# Altium PCB PCB.PcbDoc
Units mm, origin at the board's own origin, x right, y up, seen from the top; angles counter-clockwise.
Board outline 100 x 100 mm, 2 copper layers (Top Layer, Bottom Layer); 106 components, 61 nets, 339 pads, 12 vias.
Unrouted connection lines stored in the file: 3.
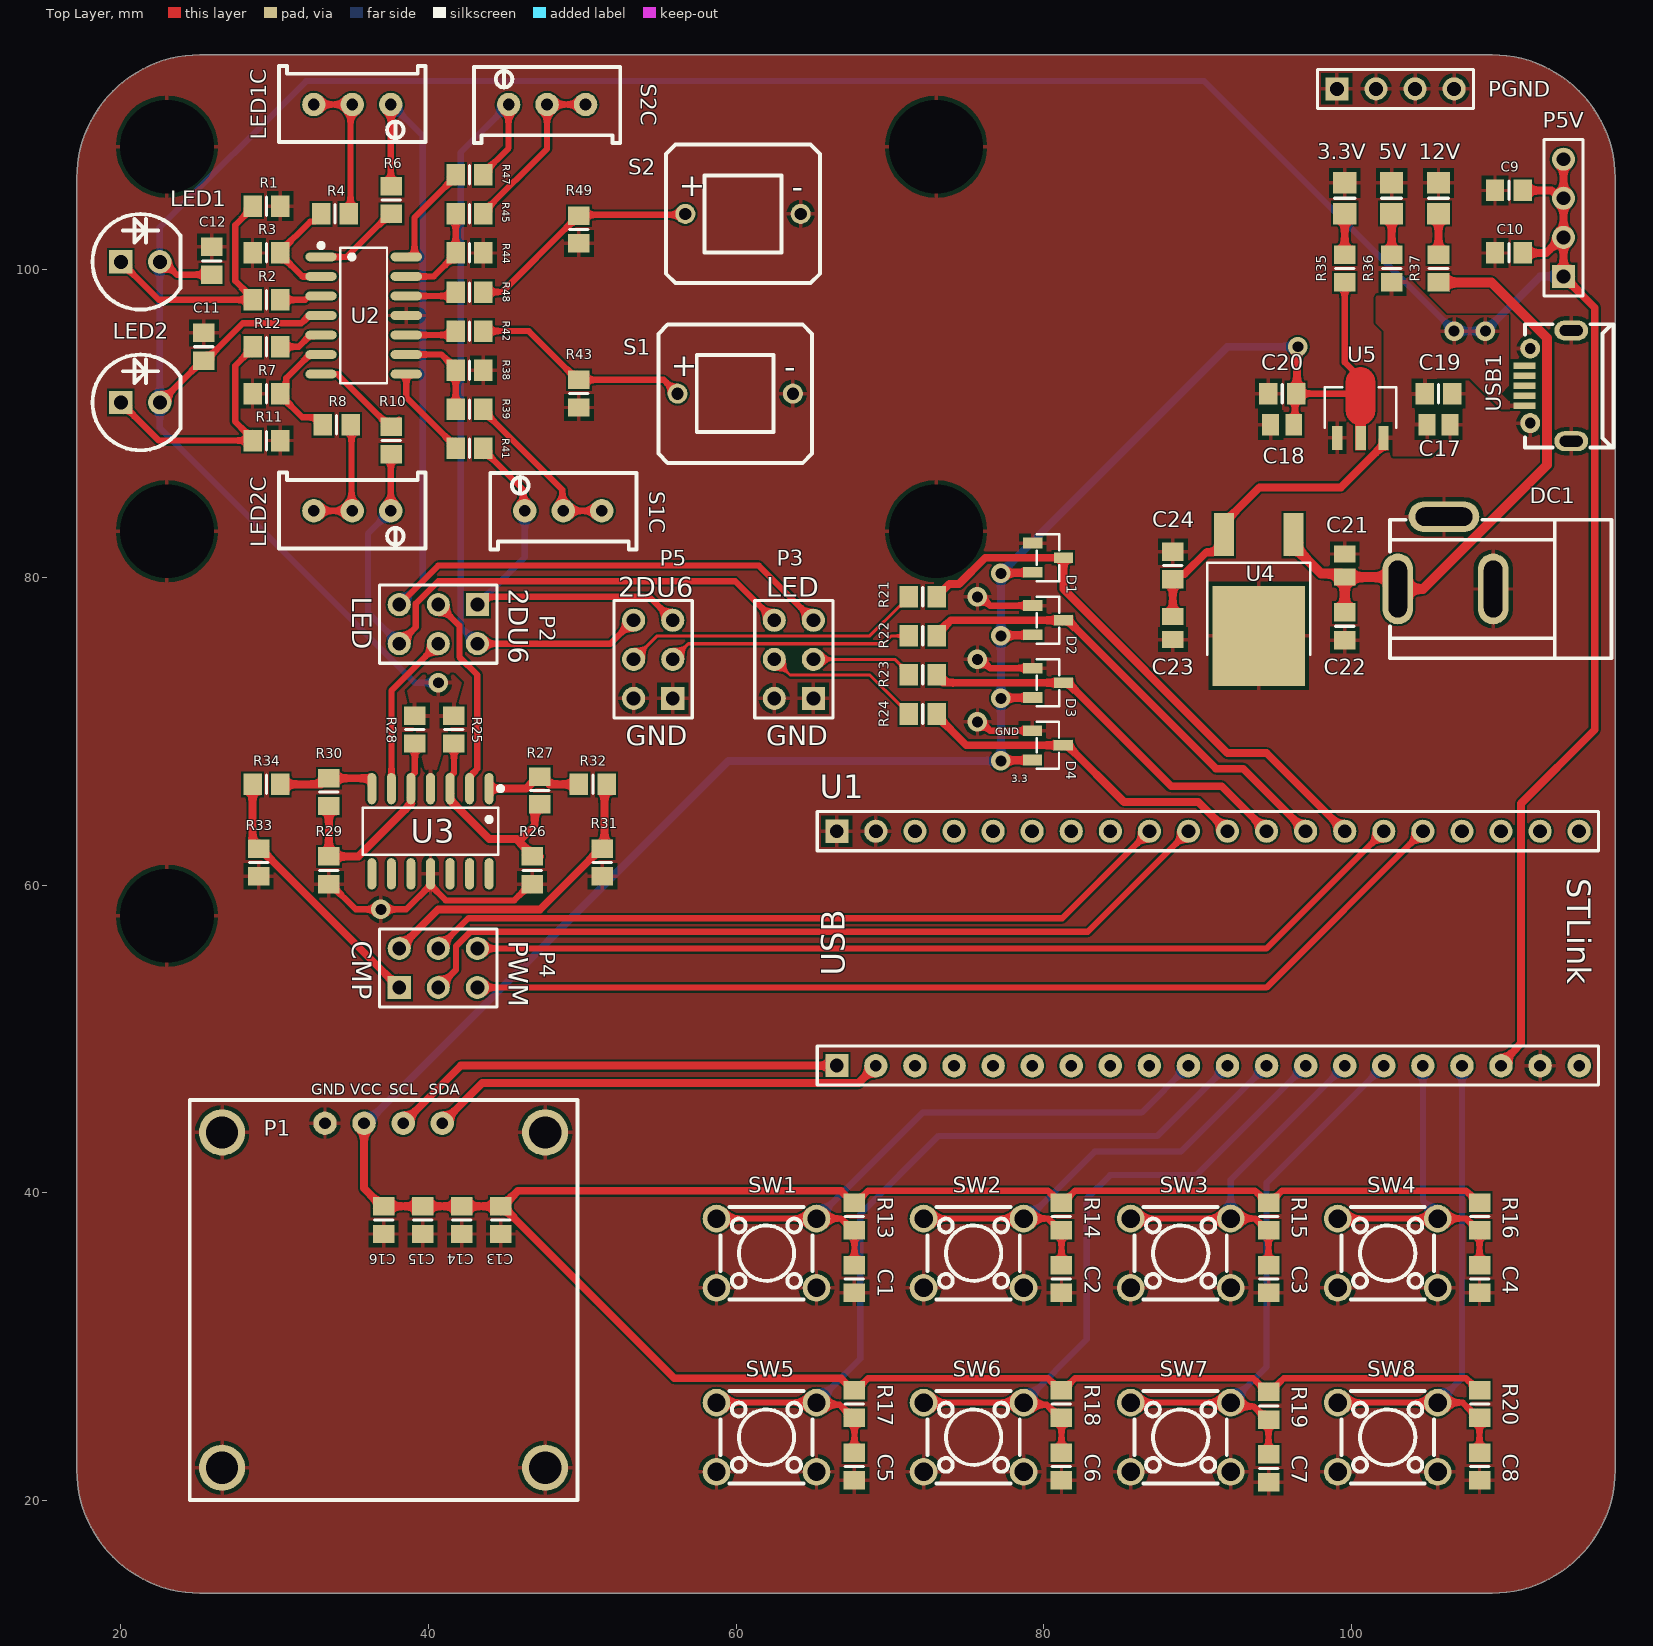
[diagram p0: Top Layer view]
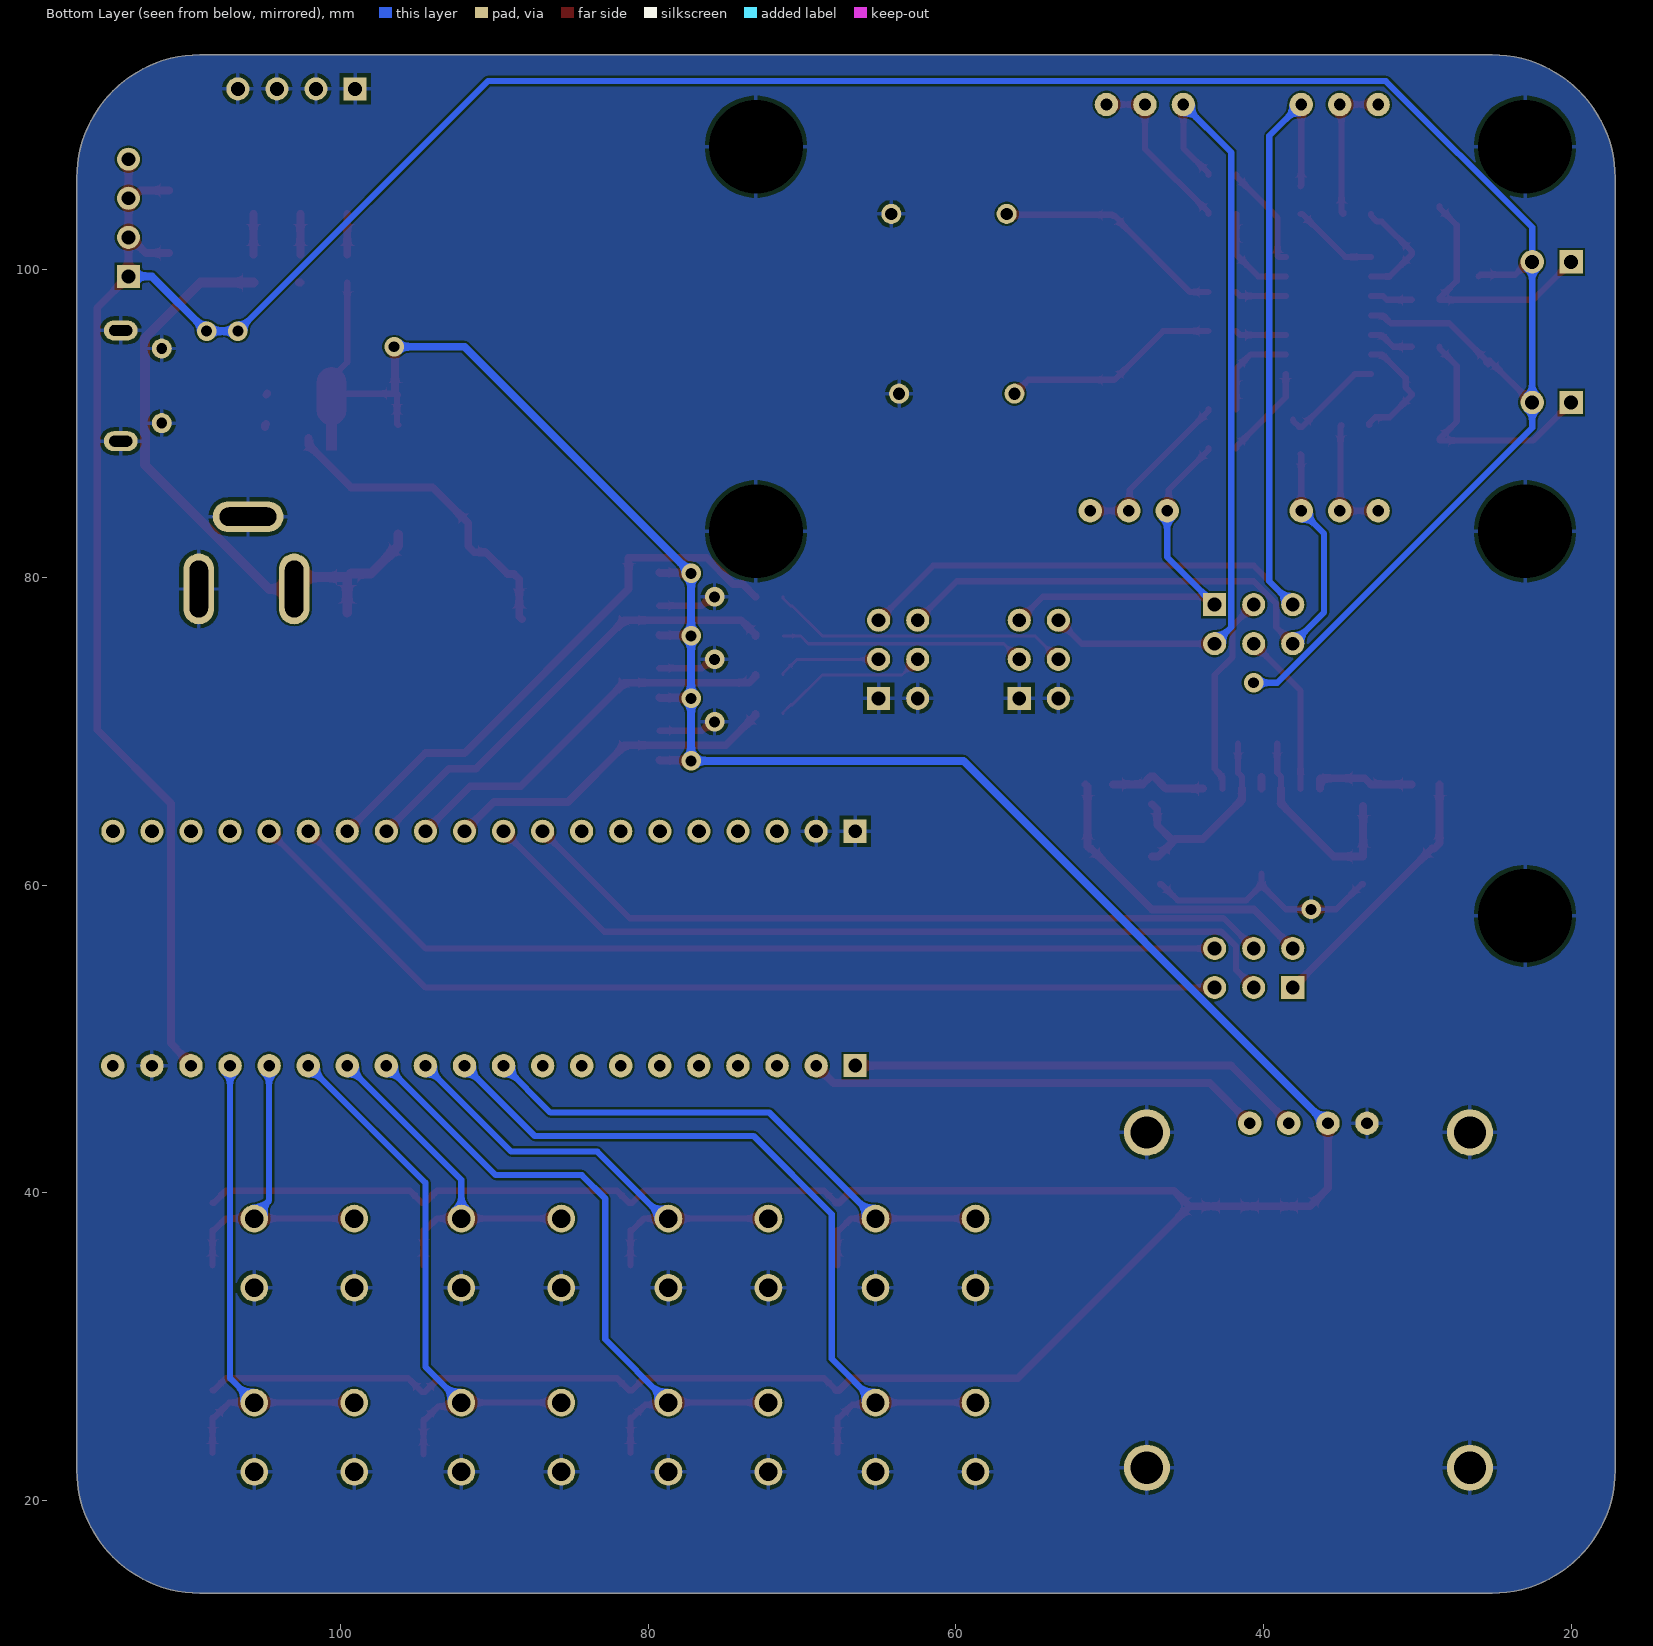
[diagram p1: Bottom Layer view, seen from below]

## Layer stack, top to bottom
Top Solder: solder mask 0.0102, Solder Resist, Dk 3.5
Top Layer: signal copper 0.0356
Dielectric 1: dielectric 0.32, FR-4, Dk 4.8
Bottom Layer: signal copper 0.0356
Bottom Solder: solder mask 0.0102, Solder Resist, Dk 3.5

## Board outline
17.145,21.97 ccw(c25.145,21.97) 25.145,13.97 109.145,13.97 ccw(c109.145,21.97) 117.145,21.97 117.145,105.97 ccw(c109.145,105.97) 109.145,113.97 25.145,113.97 ccw(c25.145,105.97) 17.145,105.97

## Design rules (kind name [scope] priority, off if disabled: settings)
Clearance [All] p1: gap=0.127 ignorepadtopadclearanceinfootprint=FALSE
DiffPairsRouting [All] p1: maxlimit=0.254 minlimit=0.127 mostfreqgap=0.254 toplayer_minwidth=0.381 toplayer_maxwidth=0.381 toplayer_prefwidth=0.381 bottomlayer_minwidth=0.381 bottomlayer_maxwidth=0.381 bottomlayer_prefwidth=0.381 maxuncoupledlength=12.7
HoleToHoleClearance [All] p1: gap=0.127 allowstackedmicrovias=TRUE
MinimumSolderMaskSliver [All] p1: minsoldermaskwidth=0.127
PlaneConnect [All] p1: planeconnectstyle=Relief reliefexpansion=0.508 reliefentries=4 reliefconductorwidth=0.254 reliefairgap=0.127
PolygonConnect 直接连接 [All vs IsNamedPolygon('NONET_L01_P000')] p1: thpad.connectstyle=Direct thpad.reliefconductorwidth=0.254 thpad.reliefentries=4 thpad.polygonreliefangle="90 Angle" thpad.airgapwidth=0.254 smdpad.connectstyle=Direct smdpad.reliefconductorwidth=0.254 smdpad.reliefentries=4 smdpad.polygonreliefangle="90 Angle" smdpad.airgapwidth=0.254 via.connectstyle=Relief via.reliefconductorwidth=0.254 via.reliefentries=4 via.polygonreliefangle="90 Angle" via.airgapwidth=0.254
PolygonConnect [All] p2: connectstyle=Relief reliefconductorwidth=0.254 reliefentries=4 polygonreliefangle="90 Angle" airgapwidth=0.254
RoutingVias [All] p1: holewidth=0.711 width=1.27 viastyle="Through Hole" minholewidth=0.2 minwidth=0.3 maxholewidth=6.3 maxwidth=9
SilkToSilkClearance [All] p1: silktosilkclearance=0.127
SilkToSolderMaskClearance [IsPad] p1: minsilkscreentomaskgap=0.127 clearancetoexposedcopper=TRUE
SolderMaskExpansion [All] p1: expansion=0.102 istentingtop=FALSE
Width [All] p1: maxlimit=1.016 minlimit=0.127 preferedwidth=0.406
24 further rules are at their usual default settings.

## Classes and differential pairs
net class Power: VCC_3.3V VCC_5V VCC_12V

## Components (designator, comment, footprint, x,y, rotation, side; value= is the part's Value field where it differs from the comment)
3.3V "" 6-0805_M 99.568,104.648 r90 top
5V "" 6-0805_M 102.616,104.648 r90 top
12V "" 6-0805_M 105.664,104.648 r90 top
C1 "Cap Semi" 6-0805_N 67.691,34.391 r270 top value=100pF
C2 "Cap Semi" 6-0805_N 81.153,34.391 r270 top value=100pF
C3 "Cap Semi" 6-0805_N 94.615,34.391 r270 top value=100pF
C4 "Cap Semi" 6-0805_N 108.331,34.391 r270 top value=100pF
C5 "Cap Semi" 6-0805_N 67.691,22.199 r270 top value=100pF
C6 "Cap Semi" 6-0805_N 81.153,22.199 r270 top value=100pF
C7 "Cap Semi" 6-0805_N 94.615,22.083 r270 top value=100pF
C8 "Cap Semi" 6-0805_N 108.331,22.199 r270 top value=100pF
C9 "Cap Semi" 6-0805_N 110.236,105.156 r0 top value=10uF
C10 "Cap Semi" 6-0805_N 110.236,101.092 r0 top value=0.1uF
C11 "Cap Semi" 6-0805_N 25.4,94.996 r270 top value=0.1uF
C12 "Cap Semi" 6-0805_N 25.908,100.584 r270 top value=0.1uF
C13 "Cap Semi" 6-0805_N 44.704,38.216 r90 top value=10uF
C14 "Cap Semi" 6-0805_N 42.164,38.216 r90 top value=0.1uF
C15 "Cap Semi" 6-0805_N 39.624,38.216 r90 top value=0.1uF
C16 "Cap Semi" 6-0805_N 37.084,38.216 r90 top value=0.1uF
C17 "Cap Pol3" C0805 105.664,89.916 r0 top value=10uF
C18 "Cap Pol3" C0805 95.504,89.916 r180 top value=10uF
C19 "Cap Semi" 6-0805_N 105.664,91.948 r180 top value=10pF
C20 "Cap Semi" 6-0805_N 95.504,91.948 r0 top value=10pF
C21 "Cap Pol3" C0805 99.568,80.772 r90 top value=10uF
C22 "Cap Semi" 6-0805_N 99.568,76.824 r270 top value=10pF
C23 "Cap Pol3" C0805 88.392,76.708 r270 top value=10uF
C24 "Cap Semi" 6-0805_N 88.392,80.772 r270 top value=10pF
D1 "BAT54S_C501650" SOT-23-3_L2.9-W1.3-P1.90-LS2.4-BR 80.28,81.28 r180 top
D2 "BAT54S_C501650" SOT-23-3_L2.9-W1.3-P1.90-LS2.4-BR 80.28,77.216 r180 top
D3 "BAT54S_C501650" SOT-23-3_L2.9-W1.3-P1.90-LS2.4-BR 80.28,73.152 r180 top
D4 "BAT54S_C501650" SOT-23-3_L2.9-W1.3-P1.90-LS2.4-BR 80.264,69.088 r180 top
DC1 "DC005_C431533" DC-IN-TH_DC005 106.12,81.598 r180 top
LED1 "SFH203PFA" LED-TH_BD5.9-P2.54-FD 21.336,100.584 r0 top
LED1C "RPot" RES-ADJ-TH_3P-L10.0-W10.0-P2.50-L 35.052,110.744 r180 top value=50K
LED2 "SFH203PFA" LED-TH_BD5.9-P2.54-FD 21.336,91.44 r0 top
LED2C "RPot" RES-ADJ-TH_3P-L10.0-W10.0-P2.50-L 35.052,84.328 r180 top value=50K
P1 "12864OLED" 12864_0.96_OLED 37.084,33.02 r0 top
P2 "Header 3X2" HDR2X3 43.18,78.232 r180 top
P3 "Header 3X2" HDR2X3 65.024,72.136 r90 top
P4 "Header 3X2" HDR2X3 38.1,53.34 r0 top
P5 "Header 3X2" HDR2X3 55.88,72.136 r90 top
P5V "VCC_5V" HDR1X4 113.792,99.568 r90 top
PGND "GND" HDR1X4 99.06,111.76 r0 top
R1 "Res2" 6-0805_N 29.464,104.14 r180 top value=10K
R2 "Res2" 6-0805_N 29.464,98.044 r0 top value=1K
R3 "Res2" 6-0805_N 29.464,101.092 r0 top value=1K
R4 "Res2" 6-0805_N 33.92,103.632 r0 top value=10K
R6 "Res2" 6-0805_N 37.592,104.532 r90 top value=1K
R7 "Res2" 6-0805_N 29.464,91.948 r0 top value=1K
R8 "Res2" 6-0805_N 34.036,89.916 r0 top value=10K
R10 "Res2" 6-0805_N 37.592,88.9 r270 top value=1K
R11 "Res2" 6-0805_N 29.464,88.9 r180 top value=10K
R12 "Res2" 6-0805_N 29.464,94.996 r0 top value=1K
R13 "Res2" 6-0805_N 67.691,38.455 r270 top value=10K
R14 "Res2" 6-0805_N 81.153,38.455 r270 top value=10K
R15 "Res2" 6-0805_N 94.615,38.455 r270 top value=10K
R16 "Res2" 6-0805_N 108.331,38.455 r270 top value=10K
R17 "Res2" 6-0805_N 67.691,26.263 r270 top value=10K
R18 "Res2" 6-0805_N 81.153,26.263 r270 top value=10K
R19 "Res2" 6-0805_N 94.615,26.147 r270 top value=10K
R20 "Res2" 6-0805_N 108.331,26.263 r270 top value=10K
R21 "Res2" 6-0805_N 72.136,78.74 r0 top value=10K
R22 "Res2" 6-0805_N 72.136,76.2 r0 top value=10K
R23 "Res2" 6-0805_N 72.136,73.66 r0 top value=10K
R24 "Res2" 6-0805_N 72.136,71.12 r0 top value=10K
R25 "Res2" 6-0805_N 41.656,70.104 r90 top value=1K
R26 "Res2" 6-0805_N 46.736,60.96 r270 top value=1K
R27 "Res2" 6-0805_N 47.244,66.156 r90 top value=1K
R28 "Res2" 6-0805_N 39.116,70.104 r90 top value=1K
R29 "Res2" 6-0805_N 33.528,60.96 r270 top value=1K
R30 "Res2" 6-0805_N 33.528,66.04 r270 top value=1K
R31 "Res2" 6-0805_N 51.308,61.468 r90 top value=1K
R32 "Res2" 6-0805_N 50.684,66.548 r180 top value=1K
R33 "Res2" 6-0805_N 28.956,61.468 r90 top value=1K
R34 "Res2" 6-0805_N 29.464,66.548 r0 top value=1K
R35 "Res2" 6-0805_N 99.568,100.076 r90 top value=10K
R36 "Res2" 6-0805_N 102.616,100.076 r90 top value=10K
R37 "Res2" 6-0805_N 105.664,100.076 r90 top value=10K
R38 "Res2" 6-0805_N 42.672,93.472 r180 top value=10K
R39 "Res2" 6-0805_N 42.672,90.932 r0 top value=10K
R41 "Res2" 6-0805_N 42.672,88.392 r0 top value=1K
R42 "Res2" 6-0805_N 42.672,96.012 r180 top value=10K
R43 "Res2" 6-0805_N 49.784,91.948 r90 top value=1K
R44 "Res2" 6-0805_N 42.672,101.092 r180 top value=10K
R45 "Res2" 6-0805_N 42.672,103.632 r0 top value=10K
R47 "Res2" 6-0805_N 42.672,106.172 r0 top value=1K
R48 "Res2" 6-0805_N 42.672,98.552 r180 top value=10K
R49 "Res2" 6-0805_N 49.784,102.616 r90 top value=1K
S1 "2DU6" 2DU6PERSONAL 59.944,91.948 r0 top
S1C "RPot" RES-ADJ-TH_3P-L10.0-W10.0-P2.50-L 48.768,84.328 r0 top value=50K
S2 "2DU6" 2DU6PERSONAL 60.452,103.632 r0 top
S2C "RPot" RES-ADJ-TH_3P-L10.0-W10.0-P2.50-L 47.712,110.744 r0 top value=50K
SW1 "TS665CJ" SW-TH_4P-L6.0-W6.0-P4.50-LS6.5 61.976,36.068 r0 top
SW2 "TS665CJ" SW-TH_4P-L6.0-W6.0-P4.50-LS6.5 75.438,36.068 r0 top
SW3 "TS665CJ" SW-TH_4P-L6.0-W6.0-P4.50-LS6.5 88.9,36.068 r0 top
SW4 "TS665CJ" SW-TH_4P-L6.0-W6.0-P4.50-LS6.5 102.362,36.068 r0 top
SW5 "TS665CJ" SW-TH_4P-L6.0-W6.0-P4.50-LS6.5 61.976,24.104 r0 top
SW6 "TS665CJ" SW-TH_4P-L6.0-W6.0-P4.50-LS6.5 75.438,24.104 r0 top
SW7 "TS665CJ" SW-TH_4P-L6.0-W6.0-P4.50-LS6.5 88.9,24.104 r0 top
SW8 "TS665CJ" SW-TH_4P-L6.0-W6.0-P4.50-LS6.5 102.362,24.104 r0 top
U1 "C6T6" STM32F103C6T6 66.548,48.26 r0 top
U2 "LM324N" SOIC-14_L8.7-W3.9-P1.27-LS6.0-BL 35.789,97.028 r270 top
U3 "LM324N" SOIC-14_L8.7-W3.9-P1.27-LS6.0-BL 40.132,63.5 r180 top
U4 "MC78M05CDTRKG" TO-252-2_L6.6-W6.1-P4.57-LS9.9-TL-CW 93.98,79.492 r270 top
U5 "AMS1117-3.3" SOT-89-3_L4.5-W2.5-P1.50-LS4.2-BR 100.584,90.424 r270 top
USB1 "MICROXNJ" MICRO-USB-SMD_MICROXNJ 112.776,92.456 r90 top

## Footprints (in the part's own frame and the unit in brackets; to place one, negate y for a bottom-side part, rotate by r counter-clockwise, add the part's x,y. Pads: shape width x height; smd on the part's side, far side on the other; paste and mask are expansions set on the pad)
2DU6PERSONAL [mm]
  round 1.3 hole 0.8: 1(-3.75,0) 2(3.75,0)
  silkscreen extent -5,-4.5 5,4.5
6-0805_M [mm] "Chip Resistor, Body 2.0x1.2mm, IPC Low Density"
  rect 1.4x1.5 smd: 1(-1,0) 2(1,0)
  silkscreen extent 0,-0.65 0,0.65, body extent -1.07,-0.7 1.07,0.7, height 0.7
6-0805_N [mm] "Chip Resistor, Body 2.0x1.2mm, IPC Medium Density"
  rect 1.2x1.4 smd: 1(-0.9,0) 2(0.9,0)
  silkscreen extent 0,-0.6 0,0.6, body extent -1.07,-0.7 1.07,0.7, height 0.7
12864_0.96_OLED [mm]
  round 1.524 hole 0.762: 0(-3.81,11.5) 1(-1.27,11.5) 2(1.27,11.5) 3(3.81,11.5)
  round 3 hole 2.1 unplated: 4(-10.5,10.9) 5(10.5,10.9) 6(-10.5,-10.9) 7(10.5,-10.9)
  silkscreen extent -12.6,-13 12.6,13
C0805 [mm] "Chip Capacitor, Body 2.0x1.3mm, IPC High Density"
  rect 1.1x1.4 smd: 1(-0.75,0) 2(0.75,0)
  body extent -1.1,-0.72 1.1,0.72, height 1.4
DC-IN-TH_DC005 [mm]
  oval 2x4.6 hole 1.2 slot 3.7 at 90 deg: 1(3.1,2.35) 2(-3.1,2.35)
  oval 4.6x2 hole 1.2 slot 3.7 at 0 deg: 3(0.1,-2.35)
  silkscreen extent -10.8,-2.15 3.6,6.85
HDR1X4 [mm] "Connector; Header; 4 Position"
  rect 1.5x1.5 hole 0.9: 1(0,0)
  round 1.5 hole 0.9: 2(2.54,0) 3(5.08,0) 4(7.62,0)
  silkscreen extent -1.27,-1.27 8.89,1.27
HDR2X3 [mm] "Connector; Header; 3x2 Position"
  rect 1.5x1.5 hole 0.9: 1(0,0)
  round 1.5 hole 0.9: 2(0,2.54) 3(2.54,0) 4(2.54,2.54) 5(5.08,0) 6(5.08,2.54)
  silkscreen extent -1.27,-1.27 6.35,3.81
LED-TH_BD5.9-P2.54-FD [mil]
  rect 60x60 hole 36: 1(-52.64,-2.66)
  round 60 hole 36: 2(47.36,-2.66)
  silkscreen extent -125,-125 100,120
MICRO-USB-SMD_MICROXNJ [mm]
  rect 0.4x1.4 smd: 1(-1.3,1.521) 2(-0.65,1.521) 3(0,1.521) 4(0.65,1.521) 5(1.3,1.521)
  round 1.3 hole 0.7: 6(2.425,1.149) 9(-2.425,1.149)
  oval 1.3x2.2 hole 0.7 slot 1.5 at 90 deg: 7(3.6,-1.521) 8(-3.6,-1.521)
  silkscreen extent -4,-4.26 4,1.49
RES-ADJ-TH_3P-L10.0-W10.0-P2.50-L [mil]
  round 60 hole 30: 1(-98.42,0) 2(98.42,0) 3(0,0)
  silkscreen extent -187,-98 187,96
SOIC-14_L8.7-W3.9-P1.27-LS6.0-BL [mm]
  oval 0.574x2.038 smd: 1(-3.81,-2.769) 2(-2.54,-2.769) 3(-1.27,-2.769) 4(0,-2.769) 5(1.27,-2.769) 6(2.54,-2.769) 7(3.81,-2.769) 8(3.81,2.769) 9(2.54,2.769) 10(1.27,2.769) 11(0,2.769) 12(-1.27,2.769) 13(-2.54,2.769) 14(-3.81,2.769)
  silkscreen extent -4.7,-2.92 4.4,1.52
SOT-23-3_L2.9-W1.3-P1.90-LS2.4-BR [mm]
  rect 1.25x0.7 smd: 1(1,-0.95) 2(1,0.95) 3(-1,0)
  silkscreen extent -0.73,-1.53 0.73,1.53
SOT-89-3_L4.5-W2.5-P1.50-LS4.2-BR [mm]
  rect 1.575x0.672 smd: 1(1.356,-1.5) 2(1.356,0.024) 3(1.356,1.5)
  Top Layer region: -2.283,0.959 -0.429,0.959 -0.384,0.958 -0.34,0.955 -0.296,0.949 -0.252,0.942 -0.208,0.933 -0.165,0.921 -0.123,0.908 -0.081,0.893 -0.04,0.875 0,0.856 0.04,0.835 0.078,0.812 0.115,0.788 0.151,0.761 0.185,0.733 0.219,0.704 0.251,0.673 0.281,0.64 0.31,0.606 0.337,0.571 0.362,0.534 0.386,0.497 0.408,0.458 0.428,0.418 0.447,0.339 2.144,0.339 2.144,-0.321 0.447,-0.321 0.428,-0.401 0.408,-0.44 0.386,-0.479 0.362,-0.517 0.337,-0.553 0.31,-0.588 0.281,-0.622 0.251,-0.655 0.219,-0.686 0.185,-0.716 0.151,-0.744 0.115,-0.77 0.078,-0.795 0.04,-0.818 0,-0.839 -0.04,-0.858 -0.081,-0.875 -0.123,-0.89 -0.165,-0.904 -0.208,-0.915 -0.252,-0.925 -0.296,-0.932 -0.34,-0.937 -0.384,-0.94 -0.429,-0.941 -2.283,-0.941 -2.328,-0.94 -2.372,-0.937 -2.416,-0.932 -2.46,-0.925 -2.504,-0.915 -2.547,-0.904 -2.589,-0.89 -2.631,-0.875 -2.672,-0.858 -2.713,-0.839 -2.752,-0.818 -2.79,-0.795 -2.827,-0.77 -2.863,-0.744 -2.898,-0.716 -2.931,-0.686 -2.963,-0.655 -2.993,-0.622 -3.022,-0.588 -3.049,-0.553 -3.075,-0.517 -3.098,-0.479 -3.12,-0.44 -3.141,-0.401 -3.159,-0.36 -3.175,-0.318 -3.189,-0.276 -3.202,-0.233 -3.212,-0.19 -3.22,-0.146 -3.227,-0.102 -3.231,-0.058 -3.233,-0.013 -3.233,0.031 -3.231,0.076 -3.227,0.12 -3.22,0.164 -3.212,0.208 -3.202,0.251 -3.189,0.294 -3.175,0.336 -3.159,0.377 -3.141,0.418 -3.12,0.458 -3.098,0.497 -3.075,0.534 -3.049,0.571 -3.022,0.606 -2.993,0.64 -2.963,0.673 -2.931,0.704 -2.898,0.733 -2.863,0.761 -2.827,0.788 -2.79,0.812 -2.752,0.835 -2.713,0.856 -2.672,0.875 -2.631,0.893 -2.589,0.908 -2.547,0.921 -2.504,0.933 -2.46,0.942 -2.416,0.949 -2.372,0.955 -2.328,0.958
  silkscreen extent -1.95,-2.33 0.7,2.33
STM32F103C6T6 [mm] "Connector; Header; 20X2 Position"
  rect 1.5x1.5 hole 0.9: 0(0,15.24) 20(0,0)
  round 1.5 hole 0.9: 1(2.54,15.24) 2(5.08,15.24) 3(7.62,15.24) 4(10.16,15.24) 5(12.7,15.24) 6(15.24,15.24) 7(17.78,15.24) 8(20.32,15.24) 9(22.86,15.24) 10(25.4,15.24) 11(27.94,15.24) 12(30.48,15.24) 13(33.02,15.24) 14(35.56,15.24) 15(38.1,15.24) 16(40.64,15.24) 17(43.18,15.24) 18(45.72,15.24) 19(48.26,15.24)
  round 1.524 hole 0.762: 21(2.54,0) 22(5.08,0) 23(7.62,0) 24(10.16,0) 25(12.7,0) 26(15.24,0) 27(17.78,0) 28(20.32,0) 29(22.86,0) 30(25.4,0) 31(27.94,0) 32(30.48,0) 33(33.02,0) 34(35.56,0) 35(38.1,0) 36(40.64,0) 37(43.18,0) 38(45.72,0) 39(48.26,0)
  silkscreen extent -1.27,-1.27 49.53,16.51
SW-TH_4P-L6.0-W6.0-P4.50-LS6.5 [mm]
  round 1.8 hole 1.2: 1(-3.25,2.25) 2(3.25,2.25) 3(-3.25,-2.25) 4(3.25,-2.25)
  silkscreen extent -3,-3 3,3
TO-252-2_L6.6-W6.1-P4.57-LS9.9-TL-CW [mm]
  rect 2.8x1.3 smd: 1(-3.292,2.273) 3(-3.292,-2.273)
  rect 6.5x6 smd: 2(3.292,0)
  silkscreen extent -1.46,-3.35 4.51,3.34

## Part data
3.3V 5V 12V: library part LED3, "Typical BLUE SiC LED", DatasheetVersion=16-Apr-2002, LatestRevisionDate=17-Dec-2003, LatestRevisionNote="PCB Footprint replaced.", PackageDescription="SM LED; 2 C-Bend Leads; Body 3.5 x 2.8 x 1.9 mm, inc leads (LxWxH typ)", PackageReference=3.5X2.8X1.9, PackageVersion=16-Apr-2002, Published=8-Jun-2000, Publisher="Altium Limited"
C1 C2 C3 C4 C5 C6 C7 C8 C9 C10 C11 C12 C13 C14 C15 C16 C19 C20 C22 C24: "Capacitor (Semiconductor SIM Model)", LatestRevisionDate=29-May-2009, LatestRevisionNote="IPC-7351 Footprint Added.", PackageDescription="Chip Capacitor", PackageReference=C1206, Published=8-Jun-2000, Publisher="Altium Limited"
C17 C18 C21 C23: "Polarized Capacitor (Surface Mount)", LatestRevisionDate=29-May-2009, LatestRevisionNote="IPC-7351 Footprint Added.", PackageDescription="Chip Capacitor", PackageReference=C0805, Published=8-Jun-2000, Publisher="Altium Limited"
D1 D2 D3 D4: BOM_JLCPCB Part Class="Extended Part", BOM_Manufacturer=JF, BOM_Manufacturer Part=BAT54S, BOM_Supplier=LCSC, BOM_Supplier Part=C501650, Contributor=LCSC, spicePre=D, spiceSymbolName=BAT54S_C501650
DC1: BOM_JLCPCB Part Class="Extended Part", BOM_Manufacturer="SHOU HAN", BOM_Manufacturer Part=DC005, BOM_Supplier=LCSC, BOM_Supplier Part=C431533, Contributor=LCSC, spicePre=D, spiceSymbolName=DC005_C431533
LED1 LED2: BOM_JLCPCB Part Class="Extended Part", BOM_Manufacturer="OSRAM Opto Semicon", BOM_Manufacturer Part=SFH203PFA, BOM_Supplier=LCSC, BOM_Supplier Part=C554984, Contributor=LCSC, spicePre=L, spiceSymbolName=SFH203PFA
LED1C LED2C S1C S2C: "Potentiometer", LatestRevisionDate=17-Jul-2002, LatestRevisionNote="Re-released for DXP Platform.", PackageDescription="Variable Resistor, Thru-Hole; 3 Leads", PackageReference=VR5, Published=8-Jun-2000, Publisher="Altium Limited", Set Position=0.5, Sim Note="Enter the Resistance value and the set point into parameter fields."
P2 P3 P4 P5: "Header, 3-Pin, Dual row", LatestRevisionDate=17-Jul-2002, LatestRevisionNote="Re-released for DXP Platform.", Publisher="Altium Limited"
P5V PGND: library part "Header 4", "Header, 4-Pin", LatestRevisionDate=17-Jul-2002, LatestRevisionNote="Re-released for DXP Platform.", Publisher="Altium Limited"
R1 R2 R3 R4 R6 R7 R8 R10 R11 R12 R13 R14 R15 R16 R17 R18 R19 R20 R21 R22 R23 R24 R25 R26 R27 R28 R29 R30 R31 R32 R33 R34 R35 R36 R37 R38 R39 R41 R42 R43 R44 R45 R47 R48 R49: "Resistor", LatestRevisionDate=17-Jul-2002, LatestRevisionNote="Re-released for DXP Platform.", PackageDescription="Axial Device, Thru-Hole; 2 Leads; 0.4 in Pin Spacing", PackageReference=AXIAL-0.4, Published=8-Jun-2000, Publisher="Altium Limited"
SW1 SW2 SW3 SW4 SW5 SW6 SW7 SW8: BOM_JLCPCB Part Class="Extended Part", BOM_Manufacturer="SHOU HAN", BOM_Manufacturer Part=TS665CJ, BOM_Supplier=LCSC, BOM_Supplier Part=C393938, Contributor=LCSC, spicePre=S, spiceSymbolName=TS665CJ
U1: library part STM32F103C6T6
U2 U3: BOM_JLCPCB Part Class="Extended Part", BOM_Manufacturer=HGSEMI, BOM_Manufacturer Part=LM324N, BOM_Supplier=LCSC, BOM_Supplier Part=C725320, spicePre=U, spiceSymbolName=LM324N_C725320, subpart_no=1
U4: BOM_JLCPCB Part Class="Extended Part", BOM_Manufacturer=ON, BOM_Manufacturer Part=MC78M05CDTRKG, BOM_Supplier=LCSC, BOM_Supplier Part=C20719, spicePre=U, spiceSymbolName=MC78M05CDTRKG
U5: library part AMS1117-3.3_C880752
USB1: BOM_JLCPCB Part Class="Extended Part", BOM_Manufacturer="SHOU HAN", BOM_Manufacturer Part=MicroXNJ, BOM_Supplier=LCSC, BOM_Supplier Part=C404969, Contributor=LCSC, spicePre=U, spiceSymbolName=MICROXNJ

## Free pads (board coordinates)
  round 3 hole 6.1 unplated: 2(23,58) 2(23,83) 2(23,108) 3(73,83) 3(73,108)

## Via types
v1: diameter 1.27, hole 0.711, Top Layer to Bottom Layer, 12 vias

## Nets (pads, with @x,y where several pads share a name; then routed paths per layer and width w, separated by ;. In a path a pad name is that pad's centre, name@x,y a point inside that pad or via, vN(x,y) a via of type N, cw(c..) or ccw(c..) an arc to the next point about the centre after c; other vN are vias at no path point)
ADC12_IN2: D1.3 R21.2 U1.13 | length 36.1
  Top Layer w0.508: R21.2 73.865,79.569 74.489,79.569 76.2,81.28 D1.3 81.28,79.248 91.948,68.58 94.488,68.58 U1.13
ADC12_IN3: D2.3 R22.2 U1.12 | length 30.2
  Top Layer w0.508: R22.2 73.036,76.3 73.952,77.216 D2.3 81.555,77.216 91.207,67.564 92.964,67.564 U1.12
ADC12_IN4: D3.3 R23.2 U1.11 | length 25.7
  Top Layer w0.508: R23.2 73.036,73.56 73.444,73.152 D3.3 81.555,73.152 88.286,66.421 91.567,66.421 U1.11
ADC12_IN5: D4.3 R24.2 U1.10 | length 22.1
  Top Layer w0.508: R24.2 73.036,71.02 74.968,69.088 D4.3 81.539,69.088 85.222,65.405 90.043,65.405 U1.10
AIN2: P5.4 R21.1 | length 19.6
  Top Layer w0.203: P5.4 54.864,76.2 68.696,76.2 70.638,78.142 70.738,78.142 71.236,78.64 R21.1
AIN3: P5.3 R22.1 | length 16
  Top Layer w0.203: P5.3 56.896,75.692 69.596,75.692 70.104,76.2 R22.1
AIN4: P3.3 R23.1 | length 6.7
  Top Layer w0.203: P3.3 70.32,74.676 71.236,73.76 R23.1
AIN5: P3.4 R24.1 | length 10.3
  Top Layer w0.203: P3.4 63.5,73.66 68.696,73.66 70.638,71.718 70.738,71.718 71.236,71.22 R24.1
EncodeA: P4.3 U1.9 | length 53.9
  Top Layer w0.406: P4.3 41.791,54.491 41.791,56.019 42.733,56.96 82.868,56.96 U1.9
EncodeB: P4.4 U1.8 | length 49.4
  Top Layer w0.406: P4.4 42.596,57.836 81.204,57.836 U1.8
GND: 3.3V.2 5V.2 12V.2 C1.2 C2.2 C3.2 C4.2 C5.2 C6.2 C7.2 C8.2 C9.1 C10.1 C11.1 C12.1 C13.1 C14.1 C15.1 C16.1 C17.2 C18.2 C19.1 C20.1 C21.2 C22.2 C23.2 C24.1 D1.1 D2.1 D3.1 D4.1 DC1.2 DC1.3 P1.0 P1.4 P1.5 P1.6 P1.7 P3.1 P3.2 P5.1 P5.2 pad.2 pad.3 PGND.1 PGND.2 PGND.3 PGND.4 R1.1 R3.1 R7.1 R11.1 R26.2 R29.2 R31.1 R33.1 R38.1 R43.1 R44.1 R49.1 S1.2 S2.2 SW1.3 SW1.4 SW2.3 SW2.4 SW3.3 SW3.4 SW4.3 SW4.4 SW5.3 SW5.4 SW6.3 SW6.4 SW7.3 SW7.4 SW8.3 SW8.4 U1.0 U1.1 U1.38 U2.11 U3.11 U4.2 U5.1 USB1.5 USB1.6 USB1.7 USB1.8 USB1.9 | length 27.6
  Top Layer w0.406: R29.2 33.628,60.06 35.268,58.42 38.553,58.42 U3.11@40.132,59.999 ; U3.11 U3.11@40.132,59.999 ; R26.2 46.636,60.06 45.58,59.004 41.127,59.004 U3.11@40.132,59.999 ; v1(75.692,70.612) 75.926,70.612 76.5,70.038 D4.1 ; v1(75.692,74.676) 75.926,74.676 76.5,74.102 D3.1 ; v1(75.692,78.74) 75.926,78.74 76.5,78.166 D2.1
  other v1: 36.91,58.42
GPIO_A15: C1.1 R13.2 SW1.1 SW1.2 U1.29 | length 39.8
  Top Layer w0.406: SW1.1 SW1.2 66.828,38.318 67.591,37.555 R13.2 C1.1
  Bottom Layer w0.406: SW1.2 72.12,45.212 86.36,45.212 U1.29
GPIO_B3: C5.1 R17.2 SW5.1 SW5.2 U1.30 | length 52.9
  Top Layer w0.406: SW5.1 SW5.2 65.362,26.218 66.736,26.218 67.591,25.363 R17.2 C5.1
  Bottom Layer w0.406: SW5.2 68.072,29.2 68.072,38.608 73.152,43.688 87.376,43.688 U1.30
GPIO_B4: C2.1 R14.2 SW2.1 SW2.2 U1.31 | length 31.5
  Top Layer w0.406: SW2.1 SW2.2 80.29,38.318 81.053,37.555 R14.2 C2.1
  Bottom Layer w0.406: SW2.2 78.958,38.318 83.312,42.672 88.9,42.672 U1.31
GPIO_B5: C6.1 R18.2 SW6.1 SW6.2 U1.32 | length 44.4
  Top Layer w0.406: SW6.1 SW6.2 78.824,26.218 80.198,26.218 81.053,25.363 R18.2 C6.1
  Bottom Layer w0.406: SW6.2 82.804,30.47 82.804,39.624 84.328,41.148 89.916,41.148 U1.32
GPIO_B6: C3.1 R15.2 SW3.1 SW3.2 U1.33 | length 24.6
  Top Layer w0.406: SW3.1 SW3.2 93.752,38.318 94.515,37.555 R15.2 C3.1
  Bottom Layer w0.406: SW3.2 92.15,40.842 U1.33
GPIO_B7: C7.1 R19.2 SW7.1 SW7.2 U1.34 | length 37.7
  Top Layer w0.406: SW7.1 SW7.2 92.402,26.102 93.66,26.102 94.515,25.247 R19.2 C7.1
  Bottom Layer w0.406: SW7.2 94.488,28.692 94.488,40.64 U1.34
GPIO_B8: C4.1 R16.2 SW4.1 SW4.2 U1.35 | length 22.1
  Top Layer w0.406: SW4.1 SW4.2 107.468,38.318 108.231,37.555 R16.2 C4.1
  Bottom Layer w0.406: U1.35 104.648,39.489 105.612,38.525 SW4.2
GPIO_B9: C8.1 R20.2 SW8.1 SW8.2 U1.36 | length 34.5
  Top Layer w0.406: SW8.1 SW8.2 107.24,26.354 108.231,25.363 R20.2 C8.1
  Bottom Layer w0.406: SW8.2 107.188,27.93 U1.36
LED1_OUT: LED1C.1 P2.5 P3.5 R6.2 | length 68.8
  Top Layer w0.406: LED1C.1 37.552,105.472 R6.2 ; P2.5 40.64,80.772 61.468,80.772 P3.5
  Bottom Layer w0.406: LED1C.1 37.592,110.744 39.624,108.712 39.624,79.756 P2.5
LED2_OUT: LED2C.1 P2.6 P3.6 R10.2 | length 41.8
  Top Layer w0.406: LED2C.1 37.552,87.96 R10.2 ; P2.6 39.18,76.772 39.18,78.3 40.636,79.756 59.944,79.756 P3.6
  Bottom Layer w0.406: LED2C.1 36.068,82.844 36.068,77.724 P2.6
LOOPCMP_IN1: P2.3 U3.2 | length 13.2
  Top Layer w0.406: P2.3 42.015,76.857 42.015,74.825 43.18,73.66 43.18,67.554 42.672,67.046 U3.2
LOOPCMP_IN2: P2.4 U3.6 | length 10.7
  Top Layer w0.406: U3.6 37.592,72.644 P2.4
LOOPCMP_OUT1: P4.2 R31.2 R32.1 | length 20.2
  Top Layer w0.508: P4.2 40.64,58.42 47.26,58.42 51.208,62.368 R31.2 51.446,62.506 51.446,66.41 R32.1
LOOPCMP_OUT2: P4.1 R33.2 R34.1 | length 17.3
  Top Layer w0.508: R34.1 28.564,62.714 28.91,62.368 R33.2 29.056,62.368 37.588,53.836 37.604,53.836 P4.1
Net3.3V_1: 3.3V.1 R35.2 | length 2.7
  Top Layer w0.508: R35.2 3.3V.1
Net5V_1: 5V.1 R36.2 | length 2.7
  Top Layer w0.508: R36.2 5V.1
Net12V_1: 12V.1 R37.2 | length 2.7
  Top Layer w0.508: R37.2 12V.1
NetLED1_1: LED1.1 R1.2 R2.1 | length 16.6
  Top Layer w0.406: LED1.1 22.471,98.044 R2.1 28.564,98.144 27.432,99.276 27.432,102.908 28.564,104.04 R1.2
NetLED1C_2: LED1C.2 LED1C.3 R4.2 | length 9.8
  Top Layer w0.406: LED1C.2 LED1C.3 34.936,110.628 34.936,103.748 R4.2 R4.2@34.82,103.732
NetLED2_1: LED2.1 R11.2 R12.1 | length 16.6
  Top Layer w0.406: LED2.1 22.471,88.9 R11.2 28.564,89 27.432,90.132 27.432,93.764 28.564,94.896 R12.1
NetLED2C_2: LED2C.2 LED2C.3 R8.2 | length 8.2
  Top Layer w0.406: LED2C.2 LED2C.3 34.994,84.386 34.994,89.858 R8.2 R8.2@34.936,89.816
NetR2_2: R2.2 U2.3 | length 2.8
  Top Layer w0.406: R2.2 31.989,98.044 32.243,98.298 U2.3
NetR3_2: R3.2 R4.1 U2.2 | length 7.2
  Top Layer w0.406: U2.2 31.788,99.568 30.364,100.992 R3.2 30.364,101.192 32.307,103.135 32.623,103.135 33.02,103.532 R4.1
NetR6_1: R6.1 U2.1 | length 5.7
  Top Layer w0.406: U2.1 34.698,100.838 37.492,103.632 R6.1
NetR7_2: R7.2 R8.1 U2.6 | length 7.8
  Top Layer w0.406: U2.6 32.288,94.488 30.761,92.961 30.761,92.345 R7.2 30.364,91.848 31.799,90.413 32.739,90.413 33.136,90.016 R8.1
NetR10_1: R10.1 U2.7 | length 6.7
  Top Layer w0.406: U2.7 34.074,93.218 37.492,89.8 R10.1 37.692,89.8 38.089,90.197 R10.1@38.089,90.255
NetR12_2: R12.2 U2.5 | length 3
  Top Layer w0.406: R12.2 31.574,94.996 32.256,95.678 32.256,95.681 32.333,95.758 U2.5
NetR25_1: R25.1 R26.1 R27.1 U3.3 | length 13.9
  Top Layer w0.406: U3.3 41.402,67.046 41.656,67.3 R25.1
  Top Layer w0.508: U3.3 41.402,65.537 43.947,62.992 45.72,62.992 46.852,61.86 R26.1@47.244,61.86 ; 46.012,62.992 46.914,63.894 46.914,64.926 R27.1
NetR27_2: R27.2 R32.2 U3.1 | length 6.4
  Top Layer w0.508: U3.1 46.357,66.269 47.144,67.056 R27.2 47.344,67.056 47.852,66.548 R32.2
NetR28_1: R28.1 R29.1 R30.2 U3.5 | length 14.1
  Top Layer w0.406: U3.5 38.862,67.046 39.116,67.3 R28.1
  Top Layer w0.508: R30.2 R29.1 35.444,61.86 38.862,65.278 U3.5
NetR30_1: R30.1 R34.2 U3.7 | length 6.8
  Top Layer w0.508: R34.2 33.036,66.548 33.428,66.94 R30.1 36.292,66.94 36.322,66.91 U3.7
NetR38_2: R38.2 R39.1 U2.9 | length 6.2
  Top Layer w0.406: U2.9 40.856,94.488 41.772,93.572 R38.2 R39.1
NetR39_2: R39.2 S1C.2 S1C.3 | length 11.3
  Top Layer w0.406: R39.2 43.572,90.832 48.704,85.7 48.704,84.392 S1C.3 S1C.2
NetR41_1: R41.1 U2.8 | length 6.2
  Top Layer w0.406: U2.8 38.558,91.706 41.772,88.492 R41.1
NetR42_1: R42.1 R43.2 S1.1 | length 14.3
  Top Layer w0.406: R42.1 46.52,96.012 49.684,92.848 R43.2 55.294,92.848 S1.1
NetR42_2: R42.2 U2.10 | length 3.3
  Top Layer w0.406: U2.10 41.518,95.758 R42.2
NetR44_2: R44.2 R45.1 U2.13 | length 6.4
  Top Layer w0.406: U2.13 40.348,99.568 41.772,100.992 R44.2 R45.1
NetR45_2: R45.2 S2C.2 S2C.3 | length 11.3
  Top Layer w0.406: R45.2 43.572,103.732 47.712,107.872 S2C.3 S2C.2
NetR47_1: R47.1 U2.14 | length 6.9
  Top Layer w0.406: U2.14 39.009,100.838 39.087,100.915 39.087,103.387 41.772,106.072 R47.1
NetR48_1: R48.1 R49.2 S2.1 | length 15.3
  Top Layer w0.406: R48.1 44.782,98.552 49.287,103.058 49.287,103.119 49.684,103.516 R49.2 49.842,103.574 56.644,103.574 S2.1
NetR48_2: R48.2 U2.12 | length 3.3
  Top Layer w0.406: U2.12 41.518,98.298 R48.2
OLED_SCL: P1.2 U1.20 | length 29.7
  Top Layer w0.508: P1.2 42.094,48.26 U1.20
OLED_SDA: P1.3 U1.21 | length 29.7
  Top Layer w0.508: P1.3 43.503,47.129 67.957,47.129 U1.21
PWM_A: P4.5 U1.15 | length 65.7
  Top Layer w0.406: P4.5 94.488,53.34 U1.15
PWM_B: P4.6 U1.14 | length 62.1
  Top Layer w0.406: P4.6 94.488,55.88 U1.14
S1_OUT: P2.1 P5.5 R41.2 S1C.1 | length 26.1
  Top Layer w0.406: P2.1 43.688,78.74 54.356,78.74 P5.5 ; R41.2 43.572,88.292 46.164,85.7 46.164,84.432 S1C.1
  Bottom Layer w0.406: P2.1 46.268,81.32 S1C.1
S2_OUT: P2.2 P5.6 R47.2 S2C.1 | length 52.8
  Top Layer w0.406: P2.2 51.816,75.692 P5.6 ; R47.2 43.572,106.272 45.212,107.912 S2C.1
  Bottom Layer w0.406: P2.2 42.1,76.772 42.1,107.632 S2C.1
VCC_3.3V: C13.2 C14.2 C15.2 C16.2 C18.1 C20.2 D1.2 D2.2 D3.2 D4.2 P1.1 R13.1 R14.1 R15.1 R16.1 R17.1 R18.1 R19.1 R20.1 R35.1 U5.2 | length 263.5
  Top Layer w0.406: R17.1@67.791,27.163 68.568,27.94 80.276,27.94 81.053,27.163 R18.1 81.253,27.163 82.03,27.94 93.622,27.94 94.515,27.047 R19.1 94.715,27.047 95.608,27.94 107.454,27.94 108.231,27.163 R20.1 ; R13.1@67.791,39.355 68.568,40.132 80.276,40.132 81.053,39.355 R14.1 81.253,39.355 82.03,40.132 93.738,40.132 94.515,39.355 R15.1 94.715,39.355 95.492,40.132 107.454,40.132 108.231,39.355 R16.1 ; C18.1 96.329,89.991 C20.2@96.329,91.873 ; C20.2 100.584,91.948 ; R35.1 99.568,93.98 100.584,92.964
  Top Layer w0.508: P1.1 35.814,40.286 36.984,39.116 C16.2 C15.2 C14.2 C13.2 C13.2@44.804,39.116 ; R17.1@67.791,27.163 R17.1 67.591,27.163 66.814,27.94 55.98,27.94 C13.2@44.804,39.116 ; R13.1@67.791,39.355 R13.1 67.591,39.355 66.814,40.132 45.82,40.132 C13.2@44.804,39.116 ; v1(77.216,68.072) 77.249,68.105 79.231,68.105 D4.2 ; v1(77.216,72.136) 77.249,72.169 79.247,72.169 D3.2 ; v1(77.216,76.2) 77.249,76.233 79.247,76.233 D2.2 ; v1(77.216,80.264) 77.249,80.297 79.247,80.297 D1.2 ; C20.2@96.329,91.873 C20.2 96.462,92.006 96.462,94.938 v1(96.52,94.996)
  Bottom Layer w0.508: P1.1 35.959,44.52 59.511,68.072 v1(77.216,68.072) v1(77.216,72.136) v1(77.216,76.2) v1(77.216,80.264) 91.948,94.996 v1(96.52,94.996)
VCC_5V: C9.2 C10.2 C11.2 C12.2 C17.1 C19.2 C23.1 C24.2 LED1.2 LED2.2 P5V.1 P5V.2 P5V.3 P5V.4 R25.2 R28.2 R36.1 U1.37 U2.4 U3.4 U4.3 U5.3 USB1.1 | length 249
  Top Layer w0.406: LED2.2 22.576,91.372 25.3,94.096 C11.2 25.5,94.096 27.924,96.52 31.735,96.52 32.243,97.028 U2.4 ; LED1.2 22.814,100.516 23.646,99.684 C12.2 C12.2@26.024,99.568 ; C11.2@25.4,93.864 C11.2@25.516,93.98
  Top Layer w0.508: U3.4 U3.4@40.132,67.019 ; C23.1@88.212,77.278 C23.1 C24.2 88.738,80.218 89.141,80.218 90.561,81.638 91.311,81.638 91.707,82.034 U4.3 91.707,83.534 94.025,85.852 99.32,85.852 102.084,88.616 U5.3 ; R36.1 R36.1@102.716,99.176 ; C19.2 C19.2@104.839,91.873 ; C17.1@104.839,89.991 C17.1 C17.1@104.914,89.766 ; U1.37 109.728,48.383 110.744,49.399 110.744,49.434 111.028,49.718 111.028,65.308 115.824,70.104 115.824,97.536 P5V.1 P5V.2 ; C10.2 112.67,101.092 113.686,102.108 P5V.2 ; C9.2 113.016,105.156 113.524,104.648 P5V.3 ; P5V.4 P5V.3 ; P5V.2 P5V.3
  Bottom Layer w0.406: v1(40.64,73.152) 39.112,73.152 22.539,89.725 LED2.2 LED1.2 22.539,102.759 32.048,112.268 90.424,112.268 v1(106.68,96.012)
  Bottom Layer w0.508: v1(106.68,96.012) v1(108.712,96.012) 112.268,99.568 P5V.1
VCC_12V: C21.1 C22.1 DC1.1 R37.1 U4.1 | length 40.9
  Top Layer w0.635: U4.1 96.253,82.034 98.032,80.255 99.335,80.255 C21.1 ; C22.1 C21.1 ; R37.1 109.104,99.176 112.722,95.558 112.722,87.307 104.663,79.248 DC1.1 103.02,79.391 102.39,80.022 C21.1
pads on no net: U1.2 U1.3 U1.4 U1.5 U1.6 U1.7 U1.16 U1.17 U1.18 U1.19 U1.22 U1.23 U1.24 U1.25 U1.26 U1.27 U1.28 U1.39 U3.8 U3.9 U3.10 U3.12 U3.13 U3.14 USB1.2 USB1.3 USB1.4

## Polygon pours and split planes (outlines as drawn)
GND on Top Layer "GND_L01_P007" (solid, pour order 9): 17.145,21.97 ccw(c25.145,21.97) 25.145,13.97 109.145,13.97 ccw(c109.145,21.97) 117.145,21.97 117.145,105.97 ccw(c109.145,105.97) 109.145,113.97 25.145,113.97 ccw(c25.145,105.97) 17.145,105.97
VCC_5V on Top Layer "VCC_5V_L01_P000" (solid, remove dead copper, pour order 0): 38.608,72.644 39.624,73.66 41.656,73.66 42.164,73.152 40.359,66.836 39.903,66.836
VCC_5V on Top Layer "VCC_5V_L01_P001" (solid, remove dead copper, pour order 1): 102.108,99.568 101.6,99.06 101.6,96.52 102.108,96.012 102.108,88.392 102.616,87.884 105.156,87.884 105.664,88.392 105.664,92.964 107.696,92.964 109.728,90.932 111.76,90.932 111.76,91.44 110.236,91.44 109.728,91.948 110.236,92.456 110.236,97.028 106.172,97.028 103.632,99.568
GND on Bottom Layer "GND_L02_P008" (solid, remove dead copper, pour order 8): 17.145,21.97 ccw(c25.145,21.97) 25.145,13.97 109.145,13.97 ccw(c109.145,21.97) 117.145,21.97 117.145,105.97 ccw(c109.145,105.97) 109.145,113.97 25.145,113.97 ccw(c25.145,105.97) 17.145,105.97

## Silkscreen, mask and mechanical layers (free items; w line width, h text height)
Top Overlay:
  text "GND" at 76.858,69.746 h0.51
  text "3.3" at 77.874,66.698 h0.51
Mechanical 1:
  the board outline again, w0.254

## Text inside footprints (layer, text, board x,y; h text height)
P1: Top Overlay "SCL" at 37.465,46.355 h0.7; Top Overlay "GND" at 32.385,46.355 h0.7; Top Overlay "VCC" at 34.925,46.355 h0.7; Top Overlay "SDA" at 40.005,46.355 h0.7
P2: Top Overlay "LED" at 35.052,78.74 h1.27 r270; Top Overlay "2DU6" at 45.212,79.248 h1.27 r270
P3: Top Overlay "GND" at 61.976,69.088 h1.27; Top Overlay "LED" at 61.976,78.74 h1.27
P4: Top Overlay "PWM" at 45.212,56.388 h1.27 r270; Top Overlay "CMP" at 35.052,56.388 h1.27 r270
P5: Top Overlay "2DU6" at 52.324,78.74 h1.27; Top Overlay "GND" at 52.832,69.088 h1.27
S1: Top Overlay "-" at 63.119,92.964 h1.52; Top Overlay "+" at 55.753,93.091 h1.52
S2: Top Overlay "-" at 63.627,104.648 h1.52; Top Overlay "+" at 56.261,104.775 h1.52
U1: Top Overlay "STLink" at 114.046,60.452 h1.52 r270; Top Overlay "USB" at 67.056,54.102 h1.52 r90